# Altium PCB PCB2.PcbDoc
Units mil, origin at the board's own origin, x right, y up, seen from the top; angles counter-clockwise.
Board outline 3760.03 x 3750.03 mil, 2 copper layers (Top Layer, Bottom Layer); 73 components, 95 nets, 346 pads, 100 vias.
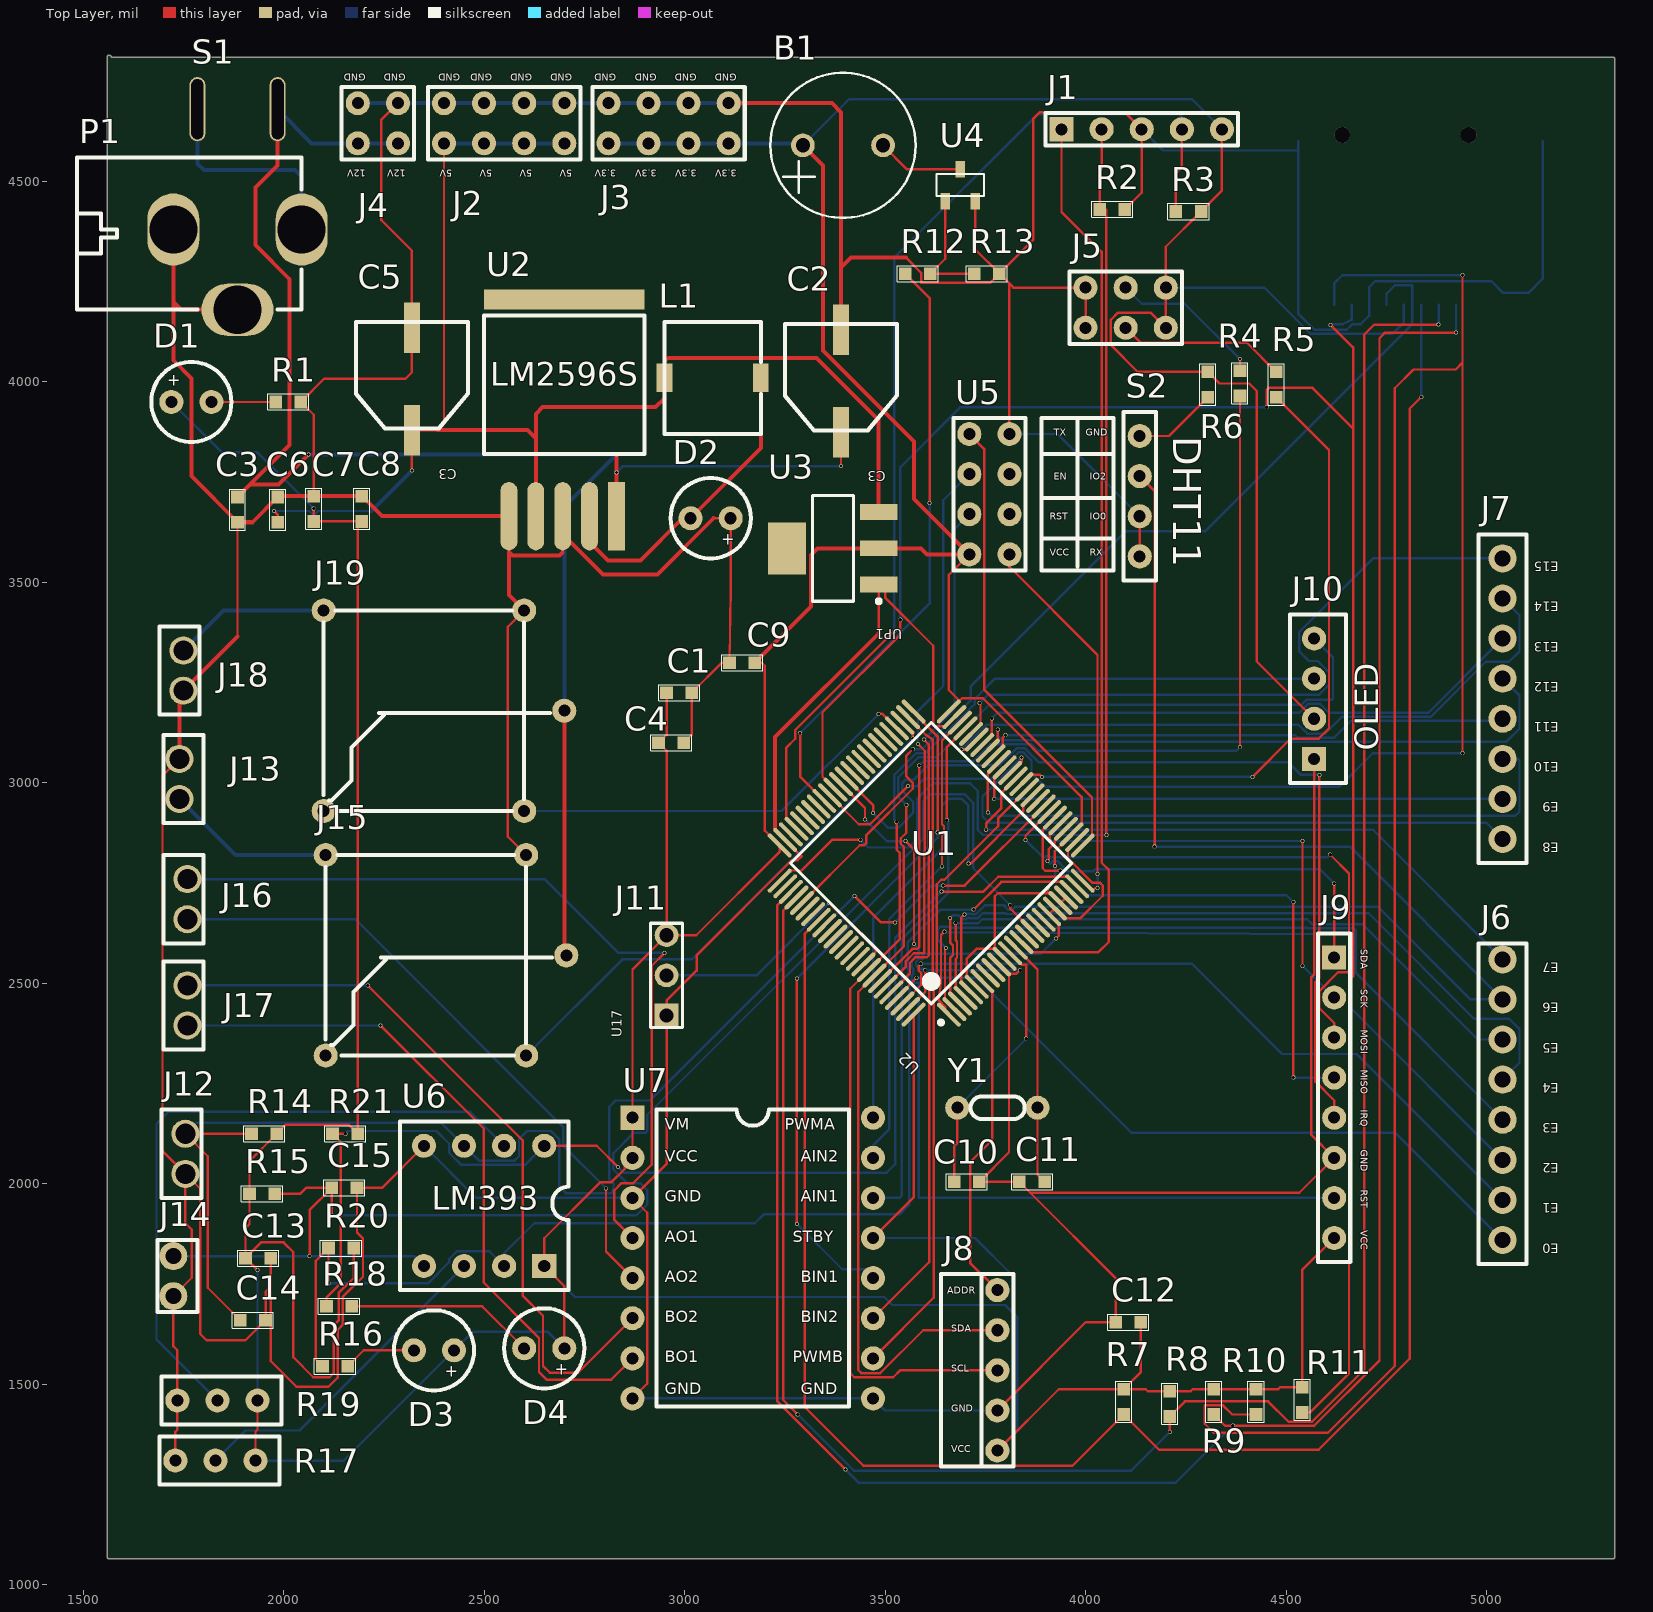
[diagram p0: Top Layer view]
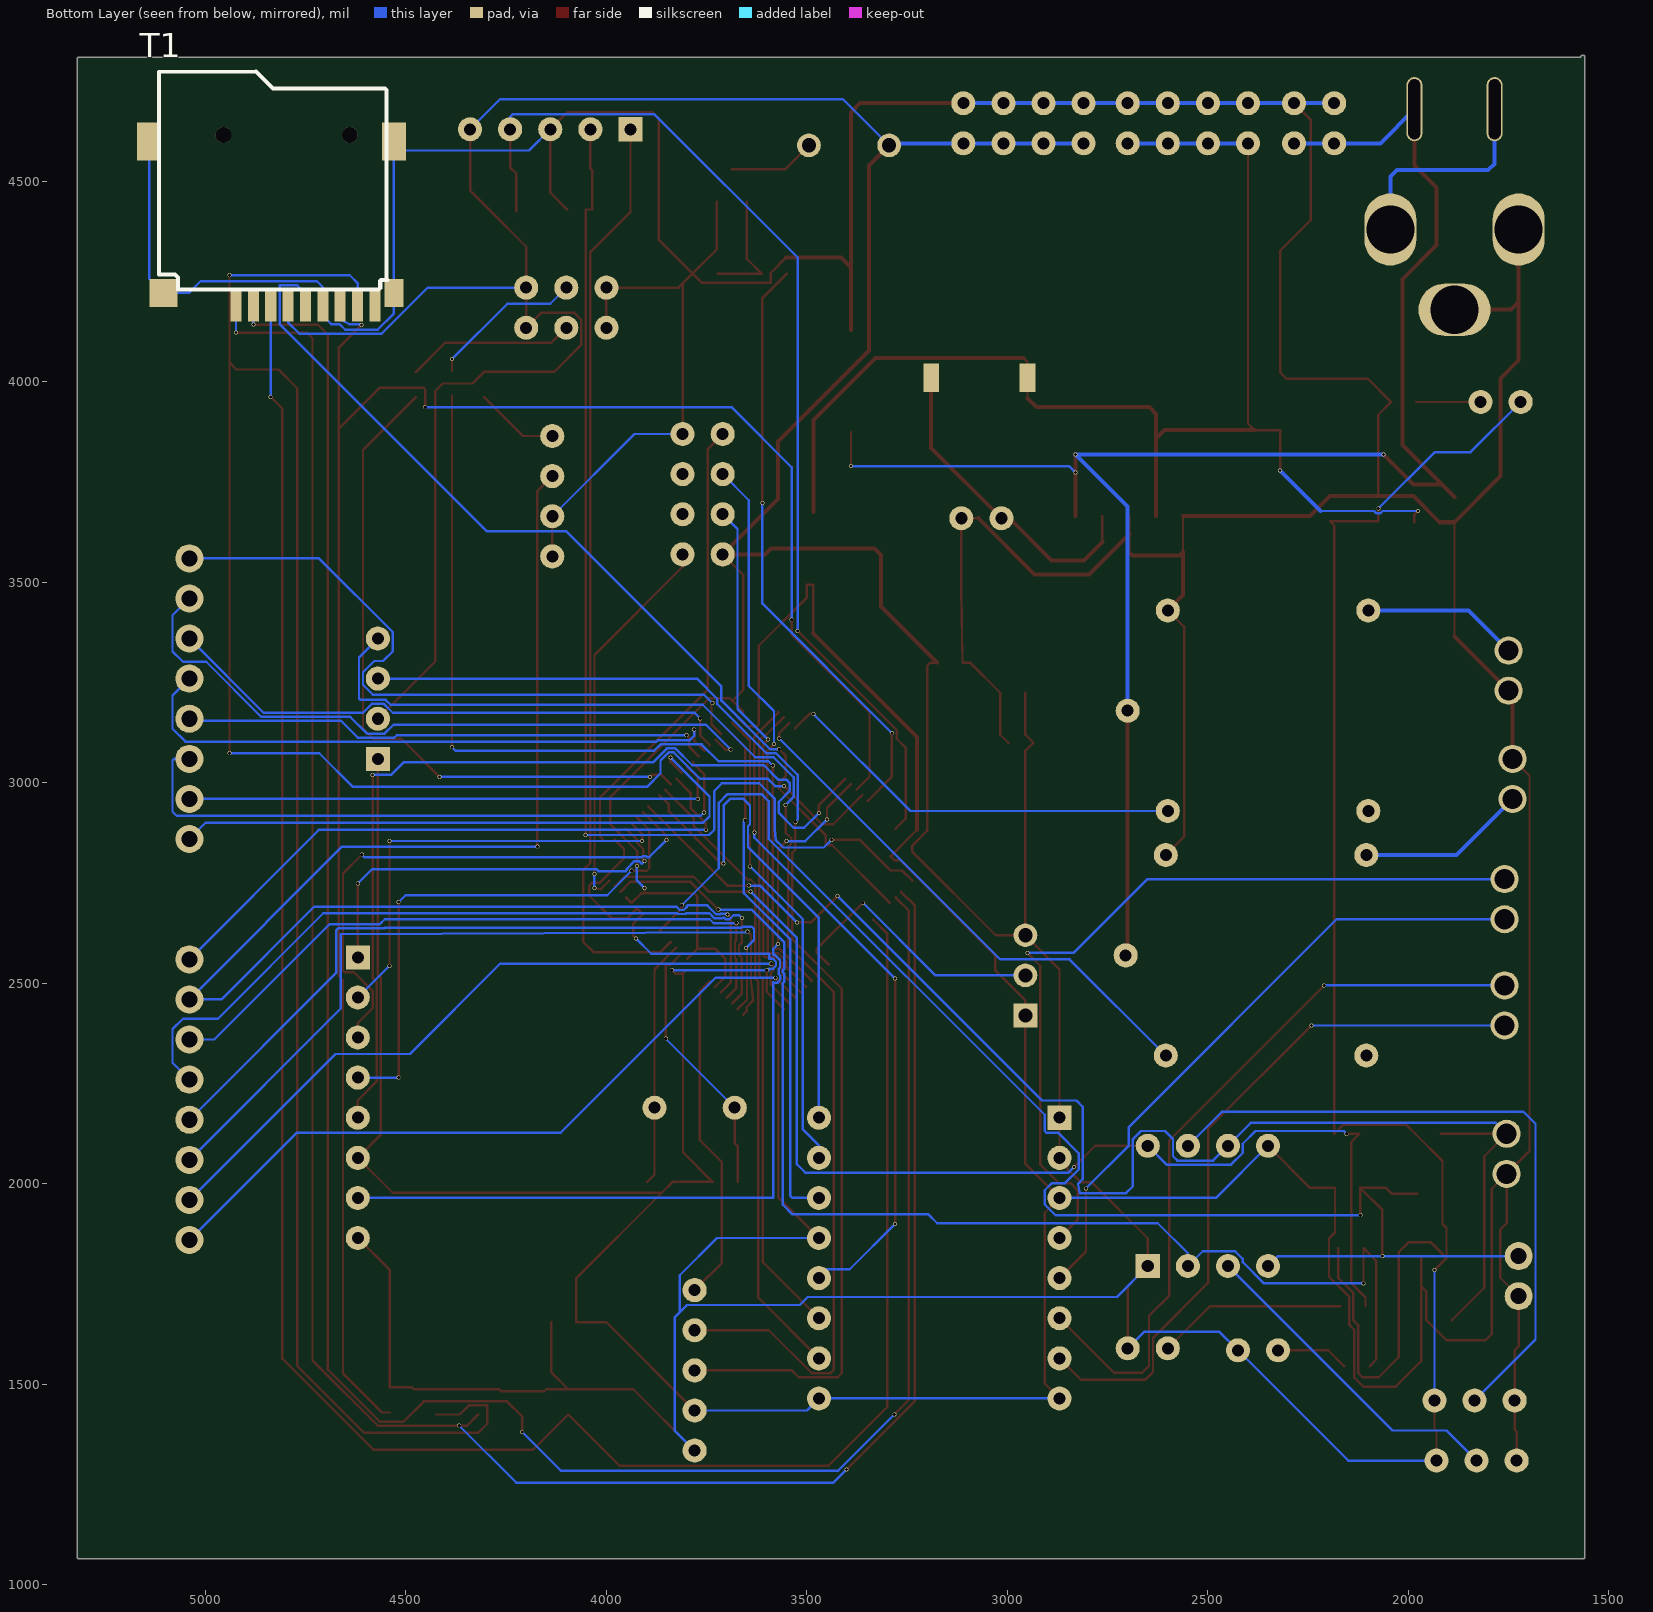
[diagram p1: Bottom Layer view, seen from below]

## Layer stack, top to bottom
Top Solder: solder mask 0.4, Solder Resist, Dk 3.5
Top Layer: signal copper 1.4
Dielectric 1: dielectric 12.6, FR-4, Dk 4.8
Bottom Layer: signal copper 1.4
Bottom Solder: solder mask 0.4, Solder Resist, Dk 3.5

## Board outline
1559.98,1070 ccw(c1565,1070) 1565,1064.98 5315,1064.98 ccw(c5315,1070) 5320.02,1070 5320.02,4805 ccw(c5315,4805) 5315,4810.02 1570.02,4810.02 ccw(c1565,4810) 1559.98,4810

## Design rules (kind name [scope] priority, off if disabled: settings)
Clearance [All] p1: gap=4
DiffPairsRouting [All] p1: maxlimit=10 minlimit=6 mostfreqgap=6 toplayer_minwidth=4 toplayer_maxwidth=10 toplayer_prefwidth=10 bottomlayer_minwidth=4 bottomlayer_maxwidth=10 bottomlayer_prefwidth=10 maxuncoupledlength=500
HoleSize [All] p1 off: absolutevalues=TRUE maxlimit=100 minlimit=1 maxpercent=80.000 minpercent=20.000
HoleToHoleClearance [All] p1 off: gap=10 allowstackedmicrovias=TRUE
LayerPairs [All] p1 off: enforce=TRUE
MinimumAnnularRing [All] p1: minimumring=4
MinimumSolderMaskSliver [All] p1 off: minsoldermaskwidth=4
NetAntennae [All] p1 off: netantennaetolerance=0
PolygonConnect [All] p1: connectstyle=Relief reliefconductorwidth=10 reliefentries=4 polygonreliefangle="90 Angle" airgapwidth=10
RoutingCorners [All] p1: cornerstyle=45-Degree minsetback=50 maxsetback=60
RoutingVias [All] p1: holewidth=8 width=10 viastyle="Through Hole" minholewidth=6 minwidth=8 maxholewidth=10 maxwidth=12
SilkToBoardRegionClearance [All] p1 off:
SilkToSilkClearance [All] p1 off: silktosilkclearance=10
SilkToSolderMaskClearance [IsPad] p1 off: minsilkscreentomaskgap=10 clearancetoexposedcopper=TRUE
SolderMaskExpansion [All] p1: expansion=4
Width [All] p1: maxlimit=15 minlimit=4 preferedwidth=6 minimp=50.000000 maximp=50.000000 favimp=50.000000
19 further rules are at their usual default settings.

## Classes and differential pairs
component class Sheet2: C13 C14 C15 D3 D4 J8 J9 J10 J11 J12 J13 J14 J15 J16 J17 J18 J19 R14 R15 R16 R17 R18 R19 R20 R21 U5 U6 U7
component class Sheet1: B1 C1 C2 C3 C4 C5 C6 C7 C8 C9 C10 C11 C12 D1 D2 J1 J2 J3 J4 J5 J6 J7 L1 P1 R1 R2 R3 R4 R5 R6 R7 R8 R9 R10 R11 R12 R13 S1 S2 T1 U2 U3 U4 Y1

## Components (designator, comment, footprint, x,y, rotation, side; value= is the part's Value field where it differs from the comment)
B1 "BEEP" BEEP-9.5X5.5 3395,4590 r0 top
C1 "0.1U" CAP_0603_FIRE 2955,3225 r0 top
C2 "220UF35V" CAP+_47UF_FIRE 3390,3985 r180 top
C3 "0.1UF" CAP_0603_FIRE 1885,3650 r90 top
C4 "0.1U" CAP_0603_FIRE 2935,3100 r0 top
C5 "220UF35V" CAP+_47UF_FIRE 2320,3990 r180 top
C6 "0.1UF" CAP_0603_FIRE 1985,3650 r90 top
C7 "22UF" CAP_0603_FIRE 2075,3715 r270 top
C8 "0.1UF" CAP_0603_FIRE 2195,3715 r270 top
C9 "0.1U" CAP_0603_FIRE 3175,3300 r180 top
C10 "20P" CAP_0603_FIRE 3735,2005 r180 top
C11 "20P" CAP_0603_FIRE 3835,2005 r0 top
C12 "0.1UF" CAP_0603_FIRE 4075,1655 r0 top
C13 "104" CAP_0603_FIRE 1905,1815 r0 top
C14 "104" CAP_0603_FIRE 1955,1660 r180 top
C15 "104" CAP_0603_FIRE 2120,1990 r0 top
D1 "LED" LED_Z 1720,3950 r0 top
D2 "ES2D" LED_Z 3115,3660 r180 top
D3 "LED" LED_Z 2425,1585 r180 top
D4 "LED" LED_Z 2700,1590 r180 top
J1 "SWD" SWD 3940,4630 r90 top
J2 "5V" 5V 2400,4595 r90 top
J3 "3.3V" 3.3V 2810,4595 r90 top
J4 "12V" 12V 2185,4595 r90 top
J5 "BOOT" BOOT 4200,4235 r270 top
J6 "PE1" PE 5040,1860 r180 top
J7 "PE2" PE2 5040,2860 r180 top
J8 "GY-302" GY 3780,1335 r180 top
J9 "RFID" RFID 4620,2565 r270 top
J10 "OLED" OLED 4570,3060 r90 top
J11 "HC-SR501" HDR1X3 2955,2420 r90 top
J12 "K1" port_2 1755,2125 r270 top
J13 "电磁阀" port_2 1740,2960 r90 top
J14 "Port" port 1725,1720 r90 top
J15 "relay" relay 2105,2320 r90 top
J16 "电机" port_2 1760,2760 r270 top
J17 "电机" port_2 1760,2495 r270 top
J18 "电磁阀" port_2 1750,3330 r270 top
J19 "relay" relay 2100,2930 r90 top
L1 "L" L 3190,4010 r270 top
P1 "Power" POWER 1885,4180 r90 top
R1 "1.5K" R_0603 1980,3950 r0 top
R2 "10K" R_0603 4035,4430 r0 top
R3 "10K" R_0603 4225,4425 r0 top
R4 "10K" R_0603 4385,3965 r90 top
R5 "10K" R_0603 4475,4025 r270 top
R6 "RES" R_0603 4305,4025 r270 top
R7 "10K" R_0603 4095,1425 r90 top
R8 "10K" R_0603 4210,1420 r90 top
R9 "10K" R_0603 4320,1425 r90 top
R10 "10K" R_0603 4425,1425 r90 top
R11 "10K" R_0603 4540,1430 r90 top
R12 "1K" R_0603 3550,4270 r0 top
R13 "10K" R_0603 3785,4270 r180 top
R14 "10K" R_0603 1920,2125 r0 top
R15 "10K" R_0603 1915,1975 r0 top
R16 "1k" R_0603 2160,1545 r180 top
R17 "103" RES_R 1730,1310 r90 top
R18 "1k" R_0603 2170,1695 r180 top
R19 "103" RES_R 1735,1460 r90 top
R20 "10K" R_0603 2175,1840 r180 top
R21 "10K" R_0603 2185,2125 r180 top
S1 "" SWITCH 1785,4680 r0 top
S2 "DHT11" DHT11 4135,3865 r270 top
T1 "TF" TF_CARD 4530,4600 r0 bottom
U1 "STM32F103VET6" STM32F103VET6-LQFP 3615,2800 r135 top
U2 "LM2596" LM2596 2830,3665 r270 top
U3 "AMS1117" AMS-1117-3.3 3370,3585 r180 top
U4 "9014" SOT-23 3650,4450 r0 top
U5 "ESP8266" ESP8266 3710,3870 r0 top
U6 "LM393" LM393 2650,2095 r270 top
U7 "TB6612" TB6612 2870,2165 r0 top
Y1 "8MHZ" XTAL 3880,2190 r180 top

## Footprints (in the part's own frame and the unit in brackets; to place one, negate y for a bottom-side part, rotate by r counter-clockwise, add the part's x,y. Pads: shape width x height; smd on the part's side, far side on the other; paste and mask are expansions set on the pad)
3.3V [mil]
  round 60 hole 30: 1(0,0) 2(0,-100) 3(0,-200) 4(0,-300) 5(100,-300) 6(100,-200) 7(100,-100) 8(100,0)
  silkscreen extent -40,-340 140,40
5V [mil]
  round 60 hole 30: 1(0,0) 2(0,-100) 3(0,-200) 4(0,-300) 5(100,0) 6(100,-100) 7(100,-200) 8(100,-300)
  silkscreen extent -40,-340 140,40
12V [mil]
  round 60 hole 30: 1(0,0) 2(0,-100) 3(100,0) 4(100,-100)
  silkscreen extent -40,-140 140,40
AMS-1117-3.3 [mm]
  rect 2.4x1 smd: 1(-2.9,2.3) 2(-2.9,0) 3(-2.9,-2.3)
  rect 2.4x3.3 smd: 4(2.9,0)
  silkscreen extent -3.03,-3.35 1.3,3.47
BEEP-9.5X5.5 [mm]
  round 1.5 hole 0.9: 1(-2.54,0) 2(2.54,0)
  silkscreen extent -4.6,-4.6 4.6,4.6
BOOT [mil]
  round 60 hole 30: 1(0,0) 2(0,-100) 3(0,-200) 4(100,-200) 5(100,-100) 6(100,0)
  silkscreen extent -40,-240 140,40
CAP+_47UF_FIRE [mm]
  rect 1x3.2 smd: 1(0,2.8) 2(0,-3.683)
  silkscreen extent -3.56,-4.06 3.56,2.7
CAP_0603_FIRE [mm]
  rect 0.8x0.8 smd: 1(0,0) 2(1.6,0)
  silkscreen extent -0.5,-0.5 2.1,0.5
DHT11 [mil]
  round 60 hole 30: 1(0,0) 2(100,0) 3(200,0) 4(300,0)
  silkscreen extent -60,-40 360,40
ESP8266 [mil]
  round 60 hole 30: 1(0,-300) 2(0,-200) 3(0,-100) 4(0,0) 5(100,-300) 6(100,-200) 7(100,-100) 8(100,0)
  silkscreen extent -40,-340 360,40
GY [mil]
  round 60 hole 30: 1(0,0) 2(0,-100) 3(0,-200) 4(0,-300) 5(0,-400)
  silkscreen extent -40,-440 140,40
HDR1X3 [mm]
  rect 1.5x1.5 hole 0.9: 1(0,0)
  round 1.5 hole 0.9: 2(2.54,0) 3(5.08,0)
  silkscreen extent -0.76,-1.02 5.84,1.02
L [mm]
  rect 1.8x1 all layers, no hole: 1(0,0) 2(0,-6.096)
  silkscreen extent -3.56,-6.1 3.56,0
LED_Z [mil]
  round 60 hole 30: 1(0,0) 2(100,0)
  silkscreen extent -50,-100 150,100
LM393 [mil]
  round 60 hole 30: 1(0,0) 2(0,-100) 3(0,-200) 4(0,-300) 5(300,-300) 6(300,-200) 7(300,-100)
  rect 60x60 hole 30: 8(300,0)
  silkscreen extent -60,-360 360,60
LM2596 [mil]
  rect 170x42 smd: 1(0,0)
  oval 170x42 smd: 2(0,-67) 3(0,-134) 4(0,-201) 5(0,-268)
  rect 50x400 smd: 6(-540,-130)
  silkscreen extent -500,-330 -155,70
OLED [mil]
  rect 60x60 hole 30: 1(0,0)
  round 60 hole 30: 2(100,0) 3(200,0) 4(300,0)
  silkscreen extent -60,-80 360,60
PE [mil]
  round 70 hole 40: 1(0,0) 2(0,-100) 3(0,-200) 4(0,-300) 5(0,-400) 6(0,-500) 7(0,-600) 8(0,-700)
  silkscreen extent -60,-740 60,60
PE2 [mil]
  round 70 hole 40: 1(0,0) 2(0,-100) 3(0,-200) 4(0,-300) 5(0,-400) 6(0,-500) 7(0,-600) 8(0,-700)
  silkscreen extent -60,-760 60,60
port [mil]
  round 70 hole 40: 1(0,0) 2(100,0)
  silkscreen extent -40,-60 140,40
port_2 [mil]
  round 70 hole 50: 1(0,0) 2(100,0)
  silkscreen extent -60,-60 160,40
POWER [mil]
  oval 180x130 hole 120: 1(200,160) 3(200,-160)
  oval 130x180 hole 120: 2(0,0)
  silkscreen extent 0,-160 380,400
R_0603 [mm]
  rect 0.8x0.8 smd: 1(0,0) 2(1.6,0)
  silkscreen extent -0.51,-0.51 2.11,0.51
relay [mil]
  round 60 hole 30: 1(0,0) 2(0,-500) 3(250,-600) 4(500,-500) 5(500,0)
  silkscreen extent 0,-564 500,0
RES_R [mil]
  round 60 hole 30: 1(0,0) 2(0,-200) 3(0,-100)
  silkscreen extent -60,-260 60,40
RFID [mil]
  rect 60x60 hole 30: 1(0,0)
  round 60 hole 30: 2(100,0) 3(200,0) 4(300,0) 5(400,0) 6(500,0) 7(600,0) 8(700,0)
  silkscreen extent -60,-40 760,40
SOT-23 [mm]
  rect 0.6x1.05 smd: 1(0,0) 2(1.9,0) 3(0.965,2.032)
  silkscreen extent -0.55,0.35 2.45,1.75
STM32F103VET6-LQFP [mil]
  oval 80x11 smd: 1(-298.23,236.22) 2(-298.23,216.53) 3(-298.23,196.85) 4(-298.23,177.17) 5(-298.23,157.48) 6(-298.23,137.8) 7(-298.23,118.11) 8(-298.23,98.43) 9(-298.23,78.74) 10(-298.23,59.05) 11(-298.23,39.37) 12(-298.23,19.68) 13(-298.23,0) 14(-298.23,-19.68) 15(-298.23,-39.37) 16(-298.23,-59.06) 17(-298.23,-78.74) 18(-298.23,-98.43) 19(-298.23,-118.11) 20(-298.23,-137.8) 21(-298.23,-157.48) 22(-298.23,-177.17) 23(-298.23,-196.85) 24(-298.23,-216.54) 25(-298.23,-236.22) 51(298.23,-236.22) 52(298.23,-216.54) 53(298.23,-196.85) 54(298.23,-177.17) 55(298.23,-157.48) 56(298.23,-137.8) 57(298.23,-118.11) 58(298.23,-98.43) 59(298.23,-78.74) 60(298.23,-59.06) 61(298.23,-39.37) 62(298.23,-19.68) 63(298.23,0) 64(298.23,19.68) 65(298.23,39.37) 66(298.23,59.05) 67(298.23,78.74) 68(298.23,98.43) 69(298.23,118.11) 70(298.23,137.8) 71(298.23,157.48) 72(298.23,177.17) 73(298.23,196.85) 74(298.23,216.53) 75(298.23,236.22)
  oval 11x80 smd: 26(-236.22,-298.23) 27(-216.54,-298.23) 28(-196.85,-298.23) 29(-177.17,-298.23) 30(-157.48,-298.23) 31(-137.8,-298.23) 32(-118.11,-298.23) 33(-98.43,-298.23) 34(-78.74,-298.23) 35(-59.05,-298.23) 36(-39.37,-298.23) 37(-19.68,-298.23) 38(0,-298.23) 39(19.68,-298.23) 40(39.37,-298.23) 41(59.05,-298.23) 42(78.74,-298.23) 43(98.43,-298.23) 44(118.11,-298.23) 45(137.8,-298.23) 46(157.48,-298.23) 47(177.17,-298.23) 48(196.85,-298.23) 49(216.54,-298.23) 50(236.22,-298.23) 76(236.22,298.23) 77(216.53,298.23) 78(196.85,298.23) 79(177.17,298.23) 80(157.48,298.23) 81(137.8,298.23) 82(118.11,298.23) 83(98.43,298.23) 84(78.74,298.23) 85(59.06,298.23) 86(39.37,298.23) 87(19.68,298.23) 88(0,298.23) 89(-19.68,298.23) 90(-39.37,298.23) 91(-59.06,298.23) 92(-78.74,298.23) 93(-98.43,298.23) 94(-118.11,298.23) 95(-137.8,298.23) 96(-157.48,298.23) 97(-177.17,298.23) 98(-196.85,298.23) 99(-216.53,298.23) 100(-236.22,298.23)
  silkscreen extent -303,-248 248,269
SWD [mil]
  rect 60x60 hole 30: 1(0,0)
  round 60 hole 30: 2(0,-100) 3(0,-200) 4(0,-300) 5(0,-400)
  silkscreen extent -40,-440 40,40
SWITCH [mil]
  oval 40x160 hole 30 slot 150 at 90 deg: 1(0,0) 2(200,0)
TB6612 [mil]
  rect 60x60 hole 30: 1(0,0)
  round 60 hole 30: 2(0,-100) 3(0,-200) 4(0,-300) 5(0,-400) 6(0,-500) 7(0,-600) 8(0,-700) 9(600,0) 10(600,-100) 11(600,-200) 12(600,-300) 13(600,-400) 14(600,-500) 15(600,-600) 16(600,-700)
  silkscreen extent 60,-720 540,20
TF_CARD [mm]
  rect 0.7x2.1 smd: 1(10,10.35) 2(8.9,10.35) 3(7.8,10.35) 4(6.7,10.35) 5(5.6,10.35) 6(4.5,10.35) 7(3.4,10.35) 8(2.3,10.35) 9(1.2,10.35)
  rect 1.2x1.778 smd: 10(0,9.6)
  rect 1.524x2.413 smd: 11(0,0) 12(15.5,0)
  rrect0% 1.778x1.778 smd: 13(14.6,9.6)
  round 1 hole 1: 14(10.8,-0.4) 15(2.8,-0.4)
  silkscreen extent 0.41,-4.42 14.88,9.4
XTAL [mil]
  round 60 hole 30: 1(0,0) 2(200,0)
  silkscreen extent 32,-28 166,28

## Part data
C1 C3 C4 C6 C7 C8 C9 C10 C11 C12 C13 C14 C15: library part Capacitance
C2 C5: library part Capactiance+
D2: library part LED
J12 J13 J16 J17 J18: library part port_2
R1 R2 R3 R4 R5 R7 R8 R9 R10 R11 R12 R13 R14 R15 R16 R18 R20 R21: library part RES
R17 R19: library part RES_R
S1: library part Switch
Y1: library part XTAL

## Via types
v1: diameter 10, hole 8, Top Layer to Bottom Layer, 100 vias

## Nets (pads, with @x,y where several pads share a name; then routed paths per layer and width w, separated by ;. In a path a pad name is that pad's centre, name@x,y a point inside that pad or via, vN(x,y) a via of type N, cw(c..) or ccw(c..) an arc to the next point about the centre after c; other vN are vias at no path point)
3.3V: B1.1 C1.1 C4.1 C7.2 C8.2 C9.1 C12.2 C13.1 D1.1 D3.1 D4.1 J1.5 J3.1 J3.2 J3.3 J3.4 J5.1 J5.6 J8.1 J9.8 J10.2 J11.3 R3.2 R6.1 R7.2 R8.2 R9.2 R10.2 R11.2 R14.2 R15.1 R17.2 R19.2 R20.1 R21.1 T1.4 U1.6 U1.11 U1.21 U1.22 U1.28 U1.50 U1.75 U1.100 U3.2 U5.1 U6.8 U7.1 U7.2 U7.12 | length 19730.2
  Top Layer w6: R17.2 1930,1382 1935,1387 R19.2 ; v1(1935,1785) C13.1 ; v1(2075,3684) C7.2 C8.2 2185,3642.01 R21.1 2162,2148 2005.99,2148 R14.2 1915,2057.01 R15.1 1915,1900 1905,1890 C13.1 ; R20.1 2175,1765.5 2137.25,1727.75 2137.25,1659.25 2125,1647 2125,1528 2115,1518 2074,1518 2024,1568 2024,1830 2000,1854 1944,1854 C13.1 ; D4.1 2700,1745 U6.8 2650,1864.39 2789.3,2003.7 2816.81,2003.7 2850.68,2037.56 2850.68,2045.68 U7.2 U7.1 2870,2535 J11.3 ; C1.1 2955,3120 C4.1 2955,3080 J11.3 ; C9.1 3192,3300 3200,3292 3200,2880.93 U1.75 3237.09,2828.11 3028.98,2620 J11.3 ; U7.12 3571.15,1966.15 U1.100 ; U1.50 3691.93,3211 3744,3211 3990,2965 3990,2896.61 3923,2829.61 3923,2794 v1(3924,2793) ; U1.50@3685.93,3205 3658.85,3232.09 3658.85,3518.85 U5.1 ; U1.6 3704,2516.13 3704,2562 3728,2586 U1.11@3773.32,2586 ; J8.1 3932.99,1487.99 R7.2 ; U1.11 U1.11@3773.32,2586 ; v1(3905,2738) 3905,2725 ; U1.22 U1.21 3912.71,2725 3905,2725 ; C12.2 4137.99,1530.98 R7.2 ; J1.5 4340,4477.01 R3.2 4200,4337.01 J5.1 J5.6 4163,4172 4080,4172 4063,4155 4063,4092 4130,4025 R6.1 4334,3996 4408,3996 4427,3977 4427,3303 J10.2 ; J9.8 4540,1785 R11.2 4485,1492.99 4480,1487.99 R10.2 R9.2 4267,1487.99 4262,1482.99 R8.2 4155,1482.99 4150,1487.99 R7.2 ; U1.11@3773.32,2586 3773,2586.32 3773,2717 3781,2725 3905,2725
  Top Layer w10: C9.1 3315,3440 3315,3568 3332,3585 U3.2 3589,3585 3604,3570 U5.1 3572,3708 3572,3851 3345,4078 3345,4540 B1.1
  Bottom Layer w6: D1.1 1845,3825 1934,3825 v1(2075,3684) ; R17.2 2150,1310 D3.1 2471,1631 2659,1631 D4.1 ; R19.2 v1(1935,1785) ; U6.8 2727,1718 3498,1718 3518,1698 3799,1698 3830,1667 3830,1385 J8.1 ; B1.1@3290,4595 B1.1 3410,4705 4265,4705 J1.5 ; U7.12 3724,1865 3817,1772 3817,1680 ; v1(3905,2738) 3924,2757 v1(3924,2793) ; J5.1 4445.64,4235 4560.64,4120 4765.78,4120 4793.78,4148 T1.4
  Bottom Layer w10: J3.1 J3.2 J3.3 J3.4 B1.1@3290,4595
5V: C5.1 C6.1 J2.1 J2.2 J2.3 J2.4 L1.2 U2.4 U3.3 | length 3378
  Top Layer w6: v1(1976,3678) 1985,3669 C6.1 ; v1(2320,3779) C5.1 2384,3879.76 2400,3895.76 J2.1 ; 2950,3959 L1.2 2950,4050 2960,4060 ; U3.3@3484,3675.55 U3.3
  Top Layer w10: 2384,3879.76 2608,3879.76 2629,3858.76 ; U2.4 2629,3858.76 ; 2950,3959 2928,3937 2646,3937 2629,3920 2629,3858.76 ; 2960,4060 3329,4060 3484,3905 U3.3@3484,3675.55
  Bottom Layer w6: v1(1976,3678) 2064.03,3678 2070.03,3672 2079.97,3672 2085.97,3678 2219,3678
  Bottom Layer w10: 2219,3678 v1(2320,3779) ; J2.1 J2.2 J2.3 J2.4
12V: C2.1 C3.2 J4.1 J4.2 J15.3 J19.3 S1.2 U2.1 | length 4469.4
  Top Layer w6: J15.3@2700,2575 J15.3 ; v1(3390,3790) C2.1
  Top Layer w10: C3.2 1916.01,3744 ; S1.2 1985,4540 1930,4485 1930,4341 2015,4256 2015,3842.99 1916.01,3744 ; v1(2062,3819) 1987,3744 1916.01,3744 ; J15.3@2700,2575 J19.3 ; U2.1 v1(2830,3774) v1(2830,3819)
  Bottom Layer w6: v1(2830,3774) 2846,3790 v1(3390,3790)
  Bottom Layer w10: S1.2 2070,4595 J4.1 J4.2 ; v1(2062,3819) v1(2830,3819) 2700,3689 J19.3
BOOT0: R4.1 U1.94 | length 2293.2
  Top Layer w6: U1.94 3568.03,2586 3580,2586 3585.05,2591.05 v1(3585.05,3043.3) ; v1(4385,3089) R4.1
  Bottom Layer w6: v1(3585.05,3043.3) 3595.74,3054 3720.58,3054 3762.58,3096 3865,3096 3881,3080 4376,3080 v1(4385,3089)
BOOT1: R5.2 U1.37 | length 1709.6
  Top Layer w6: U1.37 3862.78,3019.94 3886.06,3019.94 v1(3891,3015) ; v1(4416,3015) 4511,3110 4581,3110 4607,3136 4607,3830.01 R5.2
  Bottom Layer w6: v1(3891,3015) v1(4416,3015)
FIRE_IN: C15.1 J14.2 R15.2 U1.16 U6.5 | length 3761.1
  Top Layer w6: R15.2 2041,1975 2056,1990 C15.1 ; v1(2065,1820) 2065,1935 C15.1 ; v1(2120,1922) C15.1 ; v1(3812,2695) 3812,2686.52 U1.16
  Bottom Layer w6: J14.2 v1(2065,1820) 2325,1820 U6.5 ; v1(2120,1922) 2880,1922 2907,1949 2907,1984 2889,2002 2856,2002 2822,2036 2822,2076 2874,2128 2903,2128 2907,2132 2907,2172.49 3595,2860.49 3595,2954 3613,2972 3698,2972 3719.96,2950.04 3719.96,2787.04 v1(3812,2695)
FIRE_IN2: R17.3 U6.6 | length 820.9
  Bottom Layer w6: R17.3 1905,1385 2040,1385 U6.6
FIRE_OUT: R16.2 R20.2 U1.23 U6.7 | length 3126.6
  Top Layer w6: R16.2 2080,1562.01 2080,1807.99 R20.2 v1(2112,1752) ; v1(3721,2684) 3790,2753 3940.39,2753 U1.23
  Bottom Layer w6: v1(2112,1752) 2360,1752 2413,1805 2413,1813 2432,1832 2513,1832 U6.7 2550,1827 2625,1902 3175,1902 3197,1924 3536,1924 3560,1948 3560,2500.89 3556,2504.89 3556,2523.11 3560,2527.11 3560,2532.75 3557,2535.75 3557,2603 3638,2684 v1(3721,2684)
GND: C1.2 C2.2 C3.1 C4.2 C5.2 C6.2 C7.1 C8.1 C9.2 C10.1 C11.1 C12.1 C13.2 C14.1 C15.2 D2.1 J1.3 J2.5 J2.6 J2.7 J2.8 J3.5 J3.6 J3.7 J3.8 J4.3 J4.4 J5.3 J5.4 J8.2 J9.6 J10.1 J11.1 J12.2 J13.2 J14.1 J15.4 J18.2 J19.4 P1.1 P1.2 R1.2 R2.2 R13.1 R17.1 R19.1 S2.3 S2.4 T1.6 T1.10 T1.11 T1.12 T1.13 U1.10 U1.19 U1.20 U1.27 U1.49 U1.74 U1.99 U2.3 U2.5 U3.1 U4.2 U5.8 U6.4 U7.3 U7.8 U7.16 | length 24975
  Top Layer w6: R17.1 1730,1382 1735,1387 R19.1 1735,1585 1725,1595 J14.1 1771,1766 1771,1886 1755,1902 J12.2 ; J13.2 1698,3018 1698,2082 J12.2 ; J18.2@1740,3220 J18.2 ; 1885,3365 C3.1 ; C13.2 1967.99,1743.99 ; C6.2 C6.2@1987.01,3715 ; C7.1 2075,3917.99 R1.2 2100.99,4008 2304,4008 2320,4024 C5.2 2320,4327 2244,4403 2244,4654 J4.4 ; U6.4 2245,1990 C15.2 2182.99,1879.01 2198,1864 2198,1768.5 2147.25,1717.75 2147.25,1648.25 2135,1636 2135,1517 2112,1494 2032,1494 1967.99,1558.01 1967.99,1743.99 ; 2562,3576 U2.5 ; J19.4 2559,3389 2559,2866 J15.4 ; 2696,3575 2696,3621 U2.3 ; U7.8 2907,1502 2907,1928 U7.3 2955,2050 J11.1 2955,2457 3030,2532 3030,2570 3266.95,2806.95 3281.95,2806.95 3291.89,2816.89 U1.74 U1.74@3226,2882.77 ; C4.2 3017.99,3120 C1.2 3092.99,3300 C9.2 3115,3482.99 D2.1 3072,3660 ; 3484.17,3372.7 U3.1 3500,3494.45 3500,3462 3620,3342 3620,3145.59 3624.59,3141 3649.77,3141 U1.49 ; 3552,4310 3590,4272 3590,4247 3762,4247 R13.1 ; U1.99 3600,2478.77 v1(3600,2533) ; U4.2 3724.8,4330.2 R13.1 ; J8.2 4000,1655 C12.1 4075,1765 3862,1978 ; U1.10@3803.47,2530.91 3809,2525.39 3809,2079 C10.1 C11.1 3862,1978 ; U1.10@3809,2524.39 3827.61,2524.39 3834.94,2531.71 3834.94,2533 v1(3837,2533) ; U5.8 3810,4245 ; v1(3926,2612) 3933,2619 3933,2649.03 U1.19 U1.20 3947.87,2662 3986.14,2662 4042.81,2718.67 4042.81,2744 4036.1,2750.71 4017.3,2750.71 3956.01,2812 3956.01,2834.79 U1.27 ; J5.4 J5.3 3820,4235 3810,4245 ; R2.2 4140,4472.01 J1.3 4098,4672 3885,4672 3869,4656 3869,4354 R13.1 ; S2.4 S2.3 ; J10.1 4570,2522 4563,2515 4563,2122 J9.6 4533,1978 3862,1978 ; J12.2 1792,1988 1792,1626 1808,1610 1905,1610 C14.1 1955,1731 1967.99,1743.99 ; R13.1 3810,4245
  Top Layer w10: P1.1 1725,4199 ; J13.2 J18.2@1740,3220 ; J18.2 1885,3365 ; P1.2 1744,4180 1725,4199 ; C6.2 1922.01,3650 C3.1 1770,3765 1770,4009 1725,4054 1725,4199 ; C6.2@1987.01,3715 C7.1 C8.1 2245,3665 U2.5 ; J19.4 2562,3468 2562,3576 2571,3567 2688,3567 2696,3575 ; U2.3@2696,3621 2797,3520 2932,3520 3072,3660 ; J3.5 3367,4695 3390,4672 C2.2 ; U1.74@3226,2882.77 3226,3114.52 3484.17,3372.7 ; 3390,4285 3415,4310 3552,4310
  Bottom Layer w6: U6.4 2480,1965 U7.3 ; U7.8 U7.16 3500,1435 J8.2 ; 3593.97,2537 3584.03,2537 3577,2544.03 3577,2553.97 3584.03,2561 3593.97,2561 ; 3594,2537.03 3594,2533 v1(3600,2533) v1(3837,2533) ; 3594,2560.97 3594,2574 3888,2574 v1(3926,2612) ; U5.8 3930,3870 S2.3 ; J1.3 4193,4577 T1.11@4530,4577 ; T1.11 T1.11@4530,4577 ; T1.12 5140.24,4257.48 T1.13 5040.95,4222.05 5012.14,4250.86 4721.86,4250.86 4707.17,4236.17 T1.6 4707.17,4165 4686.34,4144.18 4665.51,4144.18 4651.33,4130 4570.64,4130 4530,4170.64 T1.10 T1.11@4530,4577
  Bottom Layer w10: J4.3 J4.4 J2.5 J2.6 J2.7 J2.8 J3.8 J3.7 J3.6 J3.5
GY_ADDR: J8.5 U1.7 | length 831.8
  Top Layer w6: U1.7 3767,2480.97 3767,2109 3712,2054 3712,1803 J8.5
I2C_SCL: J8.3 J10.3 U1.92 | length 3081.4
  Top Layer w6: v1(3529,2903) 3529,2832.81 3537,2824.81 3537,2610.65 3413,2486.65 3413,1528 3423,1518 3520.32,1518 3537.32,1535 J8.3
  Bottom Layer w6: v1(3529,2903) 3523,2909 3523,3020 3577,3074 3601.1,3074 3723.49,3196.38 3723.49,3209.49 3774,3260 J10.3
I2C_SDA: J8.4 J10.4 U1.93 | length 3271.8
  Top Layer w6: v1(3553,2945) 3553,2875.81 3539,2861.81 3539,2847.81 3547,2839.81 3547,2592.81 U1.93 3433,2478.81 3433,1536 3441,1528 3488,1528 3595,1635 J8.4
  Bottom Layer w6: v1(3553,2945) 3533,2965 3533,3014 3583,3064 3628.72,3064 3759.72,3195 4538.53,3195 4550.53,3207 4613.79,3207 4617,3210.21 4617,3313 J10.4
NetB1_2: B1.2 U4.3 | length 217.9
  Top Layer w6: B1.2 3555,4530 U4.3
NetD1_2: D1.2 R1.1 | length 160
  Top Layer w6: D1.2 R1.1
NetD2_2: D2.2 L1.1 U2.2 | length 801
  Top Layer w6: U2.2@2763,3601 U2.2 ; D2.2@2995,3660 D2.2
  Top Layer w10: U2.2@2763,3601 2809,3555 2890,3555 D2.2@2995,3660 ; D2.2 3190,3835 L1.1
NetD3_2: D3.2 R16.1 | length 181.6
  Top Layer w6: R16.1 2200,1585 D3.2
NetD4_2: D4.2 R18.1 | length 473.5
  Top Layer w6: R18.1 2495,1695 D4.2
NetJ5_2: J5.2 R4.2 | length 387.7
  Top Layer w6: R4.2 v1(4385,4057)
  Bottom Layer w6: J5.2 4140,4195 4247,4195 v1(4385,4057)
NetJ5_5: J5.5 R5.1 | length 420.6
  Top Layer w6: J5.5 4137,4098 4402,4098 R5.1
NetJ13_1: J13.1 J15.5 | length 423
  Bottom Layer w10: J13.1 1880,2820 J15.5
NetJ16_1: J16.1 U7.4 | length 2064.6
  Top Layer w6: U7.4 2825,1910 2825,1984 2843,2002 2872,2002 2918,2048 2918,2544 v1(2950,2576)
  Bottom Layer w6: J16.1 2651,2760 2835,2576 v1(2950,2576)
NetJ16_2: J16.2 U7.5 | length 1600.2
  Top Layer w6: v1(2804,1989) 2804,1831 U7.5
  Bottom Layer w6: J16.2 2179,2660 2697,2142 2697,2096 v1(2804,1989)
NetJ17_1: J17.1 U7.6 | length 1866.4
  Top Layer w6: v1(2210,2495) 2596,2109 2596,1722 2647,1671 2647,1546 2664,1529 2734,1529 U7.6
  Bottom Layer w6: J17.1 v1(2210,2495)
NetJ17_2: J17.2 U7.7 | length 1772.4
  Top Layer w6: v1(2242,2395) 2499,2138 2499,1754 2637,1616 2637,1531 2656,1512 2817,1512 U7.7
  Bottom Layer w6: J17.2 v1(2242,2395)
NetJ18_1: J18.1 J19.5 | length 391.4
  Bottom Layer w10: J18.1 1850,3430 J19.5
NetP1_3: P1.3 S1.1 | length 541.3
  Bottom Layer w10: S1.1 1785,4544 1801,4528 2029,4528 2045,4512 P1.3
NetR6_2: R6.2 S2.1 | length 210.2
  Top Layer w6: S2.1 4207.99,3865 R6.2
NetR12_2: R12.2 R13.2 U4.1 | length 304.3
  Top Layer w6: U4.1 3650,4307.01 R12.2 R13.2
NRST: J1.1 U1.14 | length 2314.2
  Top Layer w6: U1.14 3864.84,2578 4032,2578 4058,2604 4058,2782.77 4039.81,2800.96 4039.81,4324.19 3940,4424 J1.1
OSC_IN: C10.2 U1.12 Y1.2 | length 668
  Top Layer w6: C10.2 3672.01,2093 3680,2100.99 Y1.2 ; U1.12 3840.58,2546.58 3852,2546.58 v1(3852,2362)
  Bottom Layer w6: Y1.2 v1(3852,2362)
OSC_OUT: C11.2 U1.13 Y1.1 | length 614
  Top Layer w6: U1.13 3880,2535 Y1.1 3880,2022.99 C11.2
PA8: R12.1 U1.67 | length 1498.9
  Top Layer w6: v1(3288,3124) 3288,3015.65 U1.67 ; R12.1 3611,4209 v1(3611,3698)
  Bottom Layer w6: v1(3288,3124) 3611,3447 v1(3611,3698)
PB8: U1.95 U5.3 | length 1393.1
  Top Layer w6: U1.95 3552,2542.13 3552,2555.82 3571.36,2575.18 3597.18,2575.18 3599,3080.1 v1(3582,3097.1)
  Bottom Layer w6: v1(3582,3097.1) 3582,3179 3645,3242 3645,3705 U5.3
PB9: U1.96 U5.2 | length 1299.7
  Top Layer w6: U1.96 3562,2524.29 3562,2551.68 3575.07,2564.75 3604,2564.75 3609,2569.75 3609,3096 v1(3597,3108)
  Bottom Layer w6: v1(3597,3108) 3673,3184 3673,3633 U5.2
PD0: U1.81
PD1: U1.82
PD2: R7.1 T1.3 U1.83 | length 5622.6
  Top Layer w6: U1.83 3300,2624.19 3300,1443 3446,1297 3967,1297 R7.1 4183,1337 4581,1337 4808,1564 4808,3932.91 v1(4837.09,3962)
  Bottom Layer w6: v1(4837.09,3962) T1.3
PD3: U1.84
PD4: U1.85
PD5: U1.86
PD6: U1.87
PD7: U1.88
PD8: U1.55
PD9: U1.56
PD10: U1.57
PD11: U1.58
PD12: U1.59
PD13: U1.60
PD14: U1.61
PD15: U1.62
PE0: J6.1 U1.97 | length 1803.2
  Top Layer w6: U1.97 3529.4,2465.4 v1(3578,2514)
  Bottom Layer w6: v1(3578,2514) 3728,2514 4114,2128 4772,2128 J6.1
PE1: J6.2 U1.98 | length 1817.9
  Top Layer w6: U1.98 3590,2496.61 3590,2526 3584,2532 3584,2544 v1(3589,2549)
  Bottom Layer w6: v1(3589,2549) 4265,2549 4490,2324 4676,2324 J6.2
PE2: J6.3 U1.1 | length 1955.1
  Top Layer w6: v1(3648,2629) 3639.39,2620.39 3639.39,2503.39 3634,2457.09 3650.47,2440.63 3650.47,2430.47 U1.1
  Bottom Layer w6: v1(3648,2629) 3649.01,2627.99 4662,2623 4662,2438 J6.3
PE3: J6.4 U1.2 | length 1890.7
  Top Layer w6: v1(3652,2588) 3649.39,2585.39 3649.39,2459.38 U1.2
  Bottom Layer w6: v1(3652,2588) 3632,2608 3632,2636 3637.29,2641.29 3660.71,2641.29 3663,2639 4552.08,2639 4553.09,2637.99 4668.01,2637.99 4674,2632 4674,2526 J6.4
PE4: J6.5 U1.3 | length 1929.1
  Top Layer w6: v1(3662,2663) 3662,2602 3669.39,2594.61 3669.39,2570.61 3662,2563.22 3662,2474.61 U1.3
  Bottom Layer w6: v1(3662,2663) 3669,2670 3683.03,2670 3693.03,2660 3702.97,2660 3706.97,2664 3709.89,2664 3711.89,2662 3730.11,2662 3743.11,2675 3800.89,2675 3802.89,2673 3821.11,2673 3823.11,2675 4706,2675 4969,2412 5056,2412 5082,2386 5082,2302 J6.5
PE5: J6.6 U1.4 | length 1693
  Top Layer w6: v1(3676,2651) 3676,2608 3679.39,2604.61 3679.39,2564 3676,2560.61 3676,2488.45 U1.4
  Bottom Layer w6: v1(3676,2651) 3677,2650 3732.25,2650 3742.25,2660 4552.66,2660 4564.67,2647.99 4690.01,2647.99 4978,2360 J6.6
PE6: J6.7 S2.2 U1.5 | length 3631.7
  Top Layer w6: v1(3698,2672) 3690,2664 3690,2502.29 U1.5 ; S2.2 4172,3728 v1(4172,2841)
  Bottom Layer w6: v1(3698,2672) 3700,2674 3714.03,2674 3716.03,2672 3725.97,2672 3748.97,2695 3797.86,2695 3800,2692.86 3800,2690.03 3807.03,2683 3816.97,2683 3824.97,2691 4729,2691 4960,2460 J6.7 4659,2841 v1(4172,2841)
PE7: J6.8 U1.38 | length 1580.3
  Top Layer w6: v1(3752,2883) 3752,2899 3790,2937 3790,2975 U1.38
  Bottom Layer w6: v1(3752,2883) 4717,2883 J6.8
PE8: J7.1 U1.39 | length 1557.9
  Top Layer w6: U1.39 3840.33,3053.17 v1(3840.33,3063.33)
  Bottom Layer w6: v1(3840.33,3063.33) 3742.98,2965.98 3742.98,2916.4 3758.38,2901 4999,2901 J7.1
PE9: J7.2 U1.40 | length 1357.5
  Top Layer w6: v1(3772,2960) 3772,3012.68 U1.40
  Bottom Layer w6: v1(3772,2960) J7.2
PE10: J7.3 U1.41 | length 1642.5
  Top Layer w6: v1(3756.49,2926.4) 3756.49,3021.99 3784.12,3049.63 U1.41
  Bottom Layer w6: v1(3756.49,2926.4) 3764.89,2918 5072,2918 5082,2928 5082,3056 5078,3060 J7.3
PE11: J7.4 U1.42 | length 1326.7
  Top Layer w6: U1.42 3793.18,3089.54 3793.18,3112.18 v1(3800,3119)
  Bottom Layer w6: v1(3800,3119) 4523,3119 4529,3113 4620.23,3113 4662.23,3155 5035,3155 J7.4
PE12: J7.5 U1.43 | length 1540.6
  Top Layer w6: U1.43 3781,3105.19 v1(3781,3133)
  Bottom Layer w6: v1(3781,3133) 3781,3118 3793,3106 3872,3106 3875,3103 5050,3103 5082,3135 5082,3218 J7.5
PE13: J7.6 U1.44 | length 1451
  Top Layer w6: U1.44 3766,3118.03 v1(3766,3161)
  Bottom Layer w6: v1(3766,3161) 3780,3175 4532.67,3175 4554.67,3197 4585.33,3197 4607.33,3175 4855,3175 J7.6
PE14: J7.7 U1.45 | length 1710
  Top Layer w6: v1(3690,3083) 3703.13,3083 U1.45
  Bottom Layer w6: v1(3690,3083) 3752,3145 4531,3145 4553,3123 4597,3123 4639,3165 4861,3165 4998,3302 5056,3302 5082,3328 5082,3418 J7.7
PE15: J7.8 U1.46 | length 1735.3
  Top Layer w6: U1.46 3738,3145.71 3738,3197 v1(3736,3199)
  Bottom Layer w6: v1(3736,3199) 3757,3220 4582.33,3220 4607,3244.67 4607,3276 4579,3304 4557,3304 4533,3328 4533,3376 4717,3560 J7.8
RELAY_1: J15.2 U1.53 | length 1341.4
  Top Layer w6: U1.53 3569,3124.39 v1(3569,3111)
  Bottom Layer w6: J15.2 2845,2560 3018,2560 v1(3569,3111)
RELAY_2: J19.2 U1.54 | length 1044.5
  Top Layer w6: v1(3484,3172) 3493.55,3172 U1.54
  Bottom Layer w6: J19.2 3242,2930 v1(3484,3172)
RFID_IRQ: J9.5 U1.63 | length 2311.6
  Top Layer w6: U1.63 3470,2945 v1(3470,2925) ; v1(4583,3020) 4583,2513.5 4573,2503.5 4573,2255 4620,2208 J9.5
  Bottom Layer w6: v1(3470,2925) 3507,2888 3533,2888 3570,2925 3570,2953 3543,2980 3543,3000 3551.29,3008.29 3571.72,3008.29 3607.42,3044 3785.86,3044 3827.86,3086 3849.14,3086 3884.14,3051 4506,3051 4537,3020 v1(4583,3020)
RFID_RST: J9.7 U1.64 | length 2203.3
  Top Layer w6: U1.64 3450,2937.16 v1(3450,2909) ; v1(3551,2854.81) 3572,2833.81 v1(3572,2598)
  Bottom Layer w6: v1(3450,2909) 3504.19,2854.81 v1(3551,2854.81) ; v1(3572,2598) 3584,2586 3584,2571 3579.89,2571 3567,2558.11 3567,2539.89 3570,2536.89 3570,2522.97 3566,2518.97 3566,2509.03 3573.03,2502 3582.97,2502 3584,2503.03 3584,1965 J9.7
RT_OUT: J11.2 U1.91 | length 694.4
  Top Layer w6: v1(3360.48,2701) 3476,2585.48 3476,2577.48 U1.91
  Bottom Layer w6: J11.2 3179.48,2520 v1(3360.48,2701)
SDIO_CK: T1.5 U1.80 | length 2420.8
  Top Layer w6: U1.80 3436.79,2844.5 3448,2844.5 3453.42,2849.93 3453.42,2869.82 3569,2985.4 3569,3000 3553,3016 3553,3068 v1(3569,3084)
  Bottom Layer w6: v1(3569,3084) 3592,3084 3713.11,3205.11 3713.11,3240 4101.11,3628 4299,3628 4815,4144 4815,4240.86 4771.33,4240.86 4750.47,4220 T1.5
SDIO_D0: R11.1 T1.7 U1.65 | length 5069.6
  Top Layer w6: U1.65 3344,3015.32 3344,3176 3538,3370 v1(3538,3407) ; v1(4452,3937) 4452,3981 4456,3985 4566,3985 4667,3884 ; R11.1 4560,1430 4657,1527 4657,2508 4667,2518 4667,3884 ; v1(4611,4142) 4667,4086 4667,3884
  Bottom Layer w6: v1(3538,3407) 3538,3787 3688,3937 v1(4452,3937) ; v1(4611,4142) 4613.18,4144.18 4641.33,4144.18 4663.86,4155 T1.7
SDIO_D1: R10.1 T1.8 U1.66 | length 6713.7
  Top Layer w6: U1.66 3434.48,2897 3462,2897 v1(3557,2992) ; R10.1 4365.75,1425 4343,1447.75 4297,1447.75 4297,1402 4320,1379 4604,1379 4771,1546 4771,3984 4818,4031 4923,4031 4940,4048 ; v1(4940,3074) 4940,4048 ; v1(4940,4266) 4940,4048
  Bottom Layer w6: v1(3557,2992) 3579,2992 3596.95,3009.95 3765.95,3009.95 3832,3076 3845,3076 3865,3056 3865,3024 3899,2990 4632,2990 4716,3074 v1(4940,3074) ; T1.8 4620.55,4246.55 4640,4266 v1(4940,4266)
SDIO_D2: R9.1 T1.1 U1.78 | length 5870.6
  Top Layer w6: U1.78 3230.81,2694.2 3230.81,1458.19 v1(3401,1288) ; R9.1 4348,1397 v1(4367,1397) 4570,1397 4733,1560 4733,4109 4747,4123 v1(4923.7,4123)
  Bottom Layer w6: v1(3401,1288) 3434,1255 4225,1255 v1(4367,1397) ; v1(4923.7,4123) T1.1
SDIO_D3: R8.1 T1.2 U1.79 | length 5784.4
  Top Layer w6: U1.79 3246,2681.55 3246,1461 v1(3282,1425) ; v1(4210,1381) R8.1 4247.75,1457.75 4455.25,1457.75 4506,1407 4565,1407 4695,1537 4695,4118 4720,4143 v1(4880.39,4143)
  Bottom Layer w6: v1(3282,1425) 3422,1285 4114,1285 v1(4210,1381) ; v1(4880.39,4143) T1.2
SOIL_IN: C14.2 J12.1 R14.1 U1.33 U6.3 | length 3659.9
  Top Layer w6: C14.2 1811,1741.01 1811,2069 J12.1 R14.1 ; v1(3424,2718) 3490,2652 v1(3525,2652) ; v1(3645,2744) 3698.19,2744 U1.33
  Bottom Layer w6: J12.1 1782,2152 2393,2152 U6.3 2487,2058 2576,2058 2587,2069 2587,2112 2607,2132 2667,2132 2687,2112 2687,1994 2704,1977 2820,1977 2824,2000 2812,2012 2812,2192 2828,2208 2914,2208 v1(3424,2718) ; v1(3525,2652) 3617,2744 v1(3645,2744)
SOIL_IN2: R19.3 U6.2 | length 1667.6
  Bottom Layer w6: R19.3 1683,1612 1683,2150 1713,2180 2465,2180 U6.2
SOIL_OUT: R18.2 R21.2 U1.24 U6.1 | length 3054.9
  Top Layer w6: R18.2 2107.01,1716.55 2143,1752.54 2143,2104.01 R21.2 v1(2153.99,2125) ; U6.1 2781,2095 v1(2834,2042) ; v1(3641,2729) 3745,2729 3782,2766 3955.23,2766 U1.24
  Bottom Layer w6: v1(2153.99,2125) 2160.99,2132 2381,2132 2413,2100 2413,2077 2442,2048 2603,2048 U6.1 ; v1(2834,2042) 2848,2028 3504,2028 3525,2049 3525,2613 v1(3641,2729)
SPI_CS: J9.1 U1.29 | length 1033.5
  Top Layer w6: v1(3905,2805) 3907.97,2807.97 3907.97,2835 3923,2850.03 3923,2857.45 U1.29 ; J9.1 v1(4620,2749)
  Bottom Layer w6: v1(3905,2805) 3912.01,2797.99 3919.03,2805 3929.97,2805 3949,2785.97 3949,2783.14 3952.14,2780 4020.03,2780 4025.03,2785 4584,2785 v1(4620,2749)
SPI_MISO: J9.4 U1.31 | length 1338.6
  Top Layer w6: U1.31 3893,2883.13 3893,2787.33 3899.33,2781 v1(3937,2781) ; v1(4518,2265) v1(4518,2703)
  Bottom Layer w6: v1(3937,2781) 3998,2720 4501,2720 v1(4518,2703) ; v1(4518,2265) J9.4
SPI_MOSI: J9.3 U1.32 | length 1410.8
  Top Layer w6: v1(3850.1,2857.9) 3850.1,2868.06 U1.32 ; v1(4610,2821) 4657,2774 4657,2532 4653,2528 4630,2528 4583,2481 4583,2438 4620,2401 J9.3
  Bottom Layer w6: v1(3850.1,2857.9) 3893,2815 3898.03,2815 3900.03,2817 3909.97,2817 3911.97,2815 4604,2815 v1(4610,2821)
SPI_SCK: J9.2 U1.30 | length 1108.1
  Top Layer w6: v1(3911,2855) 3911,2873.29 U1.30 ; v1(4541,2544) v1(4541,2855)
  Bottom Layer w6: v1(3911,2855) v1(4541,2855) ; v1(4541,2544) J9.2
TB_AIN1: U1.47 U7.11 | length 1307.8
  Top Layer w6: v1(3654,2907) 3654,3089.55 U1.47
  Bottom Layer w6: U7.11 3536,1965 3541.05,1970.05 3541.05,2609.05 3657,2725 3657,2904 v1(3654,2907)
TB_AIN2: U1.48 U7.10 | length 1179
  Top Layer w6: v1(3642,2792) 3642,2868 3647,2873 3647,2892 3642,2897 3642,3105.39 U1.48
  Bottom Layer w6: U7.10 3470,2096 3510,2136 3510,2660 v1(3642,2792)
TB_BIN1: U1.51 U7.13 | length 1706.9
  Top Layer w6: v1(3280,1900) v1(3280,2512.28) ; U1.51 3571.15,3175.85 3631,3116 v1(3631,2876)
  Bottom Layer w6: v1(3280,1900) 3393,1787 3470,1787 U7.13 ; v1(3280,2512.28) 3631,2863.28 v1(3631,2876)
TB_BIN2: U1.52 U7.14 | length 1588.4
  Top Layer w6: U7.14 3610,1805 3610,2512 3619,2521 3619,3108 3601.23,3120 U1.52
TCK: J1.2 R2.1 U1.76 | length 2878.4
  Top Layer w6: U1.76 3262.55,2781.62 3291.62,2781.62 3368,2858 v1(3439,2858) ; J1.2 4040,4532 4035,4527 R2.1 4052,4430 v1(4052,2870)
  Bottom Layer w6: v1(3439,2858) 3458,2839 3559,2839 3578,2858 3580,2886 3580,2960 3619,2999 3712,2999 3731.24,2979.76 3731.24,2882.76 3744,2870 v1(4052,2870)
TIM3_3: U1.35 U7.9 | length 1318.2
  Top Layer w6: v1(3707.84,2799.16) 3714.16,2799.16 3844.23,2929.23 3844.23,2945.71 U1.35
  Bottom Layer w6: U7.9 3470,2662.92 3647,2839.92 3647,2892 3642,2897 3642,2944 3658,2960 3691.84,2960 3707.84,2944 v1(3707.84,2799.16)
TIM3_4: U1.36 U7.15 | length 1581.8
  Top Layer w6: U7.15 3621,1716 3621,2504 3629,2512 3629,2747.32 3640,2758.32 3648.16,2758.32 3781.87,2892.03 3781.87,2911.19 U1.36
TMS: J1.4 R3.1 U1.72 | length 2655.7
  Top Layer w6: U1.72 3254,2910.45 3254,3088 3276,3110 3276,3132 v1(3523,3379) ; R3.1 4225,4520 4240,4535 J1.4
  Bottom Layer w6: v1(3523,3379) 3523,4310 3880,4667 4234,4667 4240,4661 J1.4
USART1_RX: U1.69
USART1_TX: U1.68
USART2_RX: U1.26 U5.4 | length 1147.7
  Top Layer w6: U5.4 3747,3833 3747,3232.8 4016,2963.8 4016,2866 U1.26@4004,2854
USART2_TX: U1.25 U5.5 | length 969.3
  Top Layer w6: U5.5 3810,3539 4029.81,3319.19 4029.81,2773.19 v1(4030,2773) ; U1.25 4014.07,2735 4029,2738 v1(4030,2738)
  Bottom Layer w6: v1(4030,2738) v1(4030,2773)
pads on no net: J15.1 J19.1 T1.9 T1.14 T1.15 U1.8 U1.9 U1.15 U1.17 U1.18 U1.34 U1.70 U1.71 U1.73 U1.77 U1.89 U1.90 U2.6 U3.4 U5.6 U5.7

## Text inside footprints (layer, text, board x,y; h text height)
C2: Top Overlay "C3" at 3501.3,3777.39 h25 r180
C5: Top Overlay "C3" at 2431.3,3782.39 h25 r180
D1: Top Overlay "+" at 1710,3980 h50
D2: Top Overlay "+" at 3125,3630 h50 r180
D3: Top Overlay "+" at 2435,1555 h50 r180
D4: Top Overlay "+" at 2710,1560 h50 r180
J2: Top Overlay "GND" at 2720,4775 h30 r180; Top Overlay "GND" at 2620,4775 h30 r180; Top Overlay "GND" at 2520,4775 h30 r180; Top Overlay "GND" at 2440,4775 h30 r180
J3: Top Overlay "GND" at 2830,4775 h30 r180; Top Overlay "GND" at 2930,4775 h30 r180; Top Overlay "GND" at 3030,4775 h30 r180; Top Overlay "GND" at 3130,4775 h30 r180
J4: Top Overlay "GND" at 2305,4775 h30 r180; Top Overlay "GND" at 2205,4775 h30 r180
J6: Top Overlay "E7" at 5180,2560 h40 r180; Top Overlay "E6" at 5180,2460 h40 r180; Top Overlay "E5" at 5180,2360 h40 r180; Top Overlay "E4" at 5180,2260 h40 r180; Top Overlay "E3" at 5180,2160 h40 r180; Top Overlay "E2" at 5180,2060 h40 r180; Top Overlay "E1" at 5180,1960 h40 r180; Top Overlay "E0" at 5180,1860 h40 r180
J7: Top Overlay "E8" at 5180,2860 h40 r180; Top Overlay "E9" at 5180,2960 h40 r180; Top Overlay "E10" at 5180,3060 h40 r180; Top Overlay "E11" at 5180,3160 h40 r180; Top Overlay "E12" at 5180,3260 h40 r180; Top Overlay "E13" at 5180,3360 h40 r180; Top Overlay "E14" at 5180,3460 h40 r180; Top Overlay "E15" at 5180,3560 h40 r180
J8: Top Overlay "GND" at 3665,1425 h30; Top Overlay "VCC" at 3665,1325 h30; Top Overlay "SCL" at 3665,1525 h30; Top Overlay "SDA" at 3665,1625 h30; Top Overlay "ADDR" at 3655,1720 h30
J9: Top Overlay "SDA" at 4680,2585 h30 r270; Top Overlay "SCK" at 4680,2485 h30 r270; Top Overlay "MOSI" at 4680,2385 h30 r270; Top Overlay "MISO" at 4680,2285 h30 r270; Top Overlay "IRQ" at 4680,2185 h30 r270; Top Overlay "GND" at 4680,2085 h30 r270; Top Overlay "RST" at 4680,1985 h30 r270; Top Overlay "VCC" at 4680,1885 h30 r270
J11: Top Overlay "U17" at 2843.06,2366.06 h25 r90
U1: Top Overlay "U2" at 3590.77,2291.23 h30 r135
U2: Top Overlay "LM2596S" at 2515,3970 h100
U3: Top Overlay "UP1" at 3542.24,3383.3 h25 r180
U5: Top Overlay "GND" at 4000,3860 h30; Top Overlay "IO2" at 4010,3750 h30; Top Overlay "IO0" at 4010,3650 h30; Top Overlay "RX" at 4010,3560 h30; Top Overlay "TX" at 3920,3860 h30; Top Overlay "EN" at 3920,3750 h30; Top Overlay "RST" at 3910,3650 h30; Top Overlay "VCC" at 3910,3560 h30
U7: Top Overlay "VCC" at 2950,2045 h50; Top Overlay "VM" at 2950,2125 h50; Top Overlay "GND" at 2950,1945 h50; Top Overlay "AO1" at 2950,1845 h50; Top Overlay "AO2" at 2950,1745 h50; Top Overlay "BO2" at 2950,1645 h50; Top Overlay "BO1" at 2950,1545 h50; Top Overlay "GND" at 2950,1465 h50; Top Overlay "PWMA" at 3250,2125 h50; Top Overlay "AIN2" at 3290,2045 h50; Top Overlay "AIN1" at 3290,1945 h50; Top Overlay "STBY" at 3270,1845 h50; Top Overlay "BIN1" at 3290,1745 h50; Top Overlay "BIN2" at 3290,1645 h50; Top Overlay "PWMB" at 3270,1545 h50; Top Overlay "GND" at 3290,1465 h50